# Altium PCB ESP8266 Xmas Lights.PcbDoc
Units mil, origin at the board's own origin, x right, y up, seen from the top; angles counter-clockwise.
Board outline 3661.42 x 2086.61 mil, 2 copper layers (Top Layer, Bottom Layer), stack 65.792 mil thick; 26 components, 26 nets, 99 pads, 18 vias.
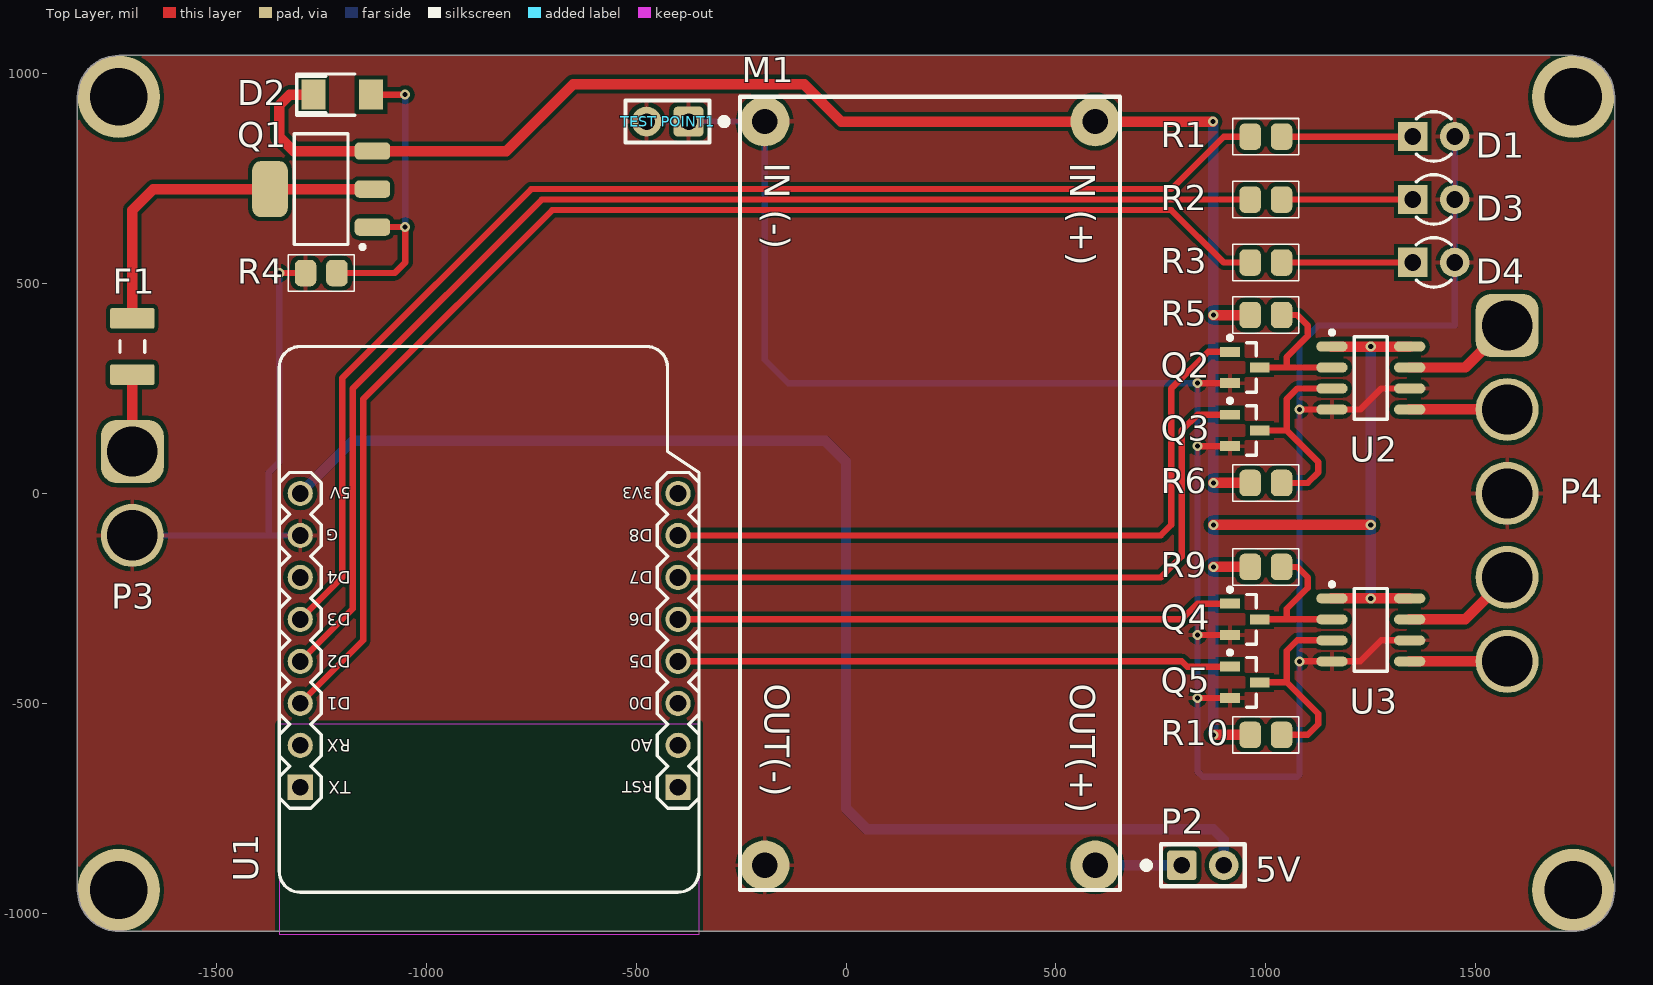
[diagram p0: Top Layer view]
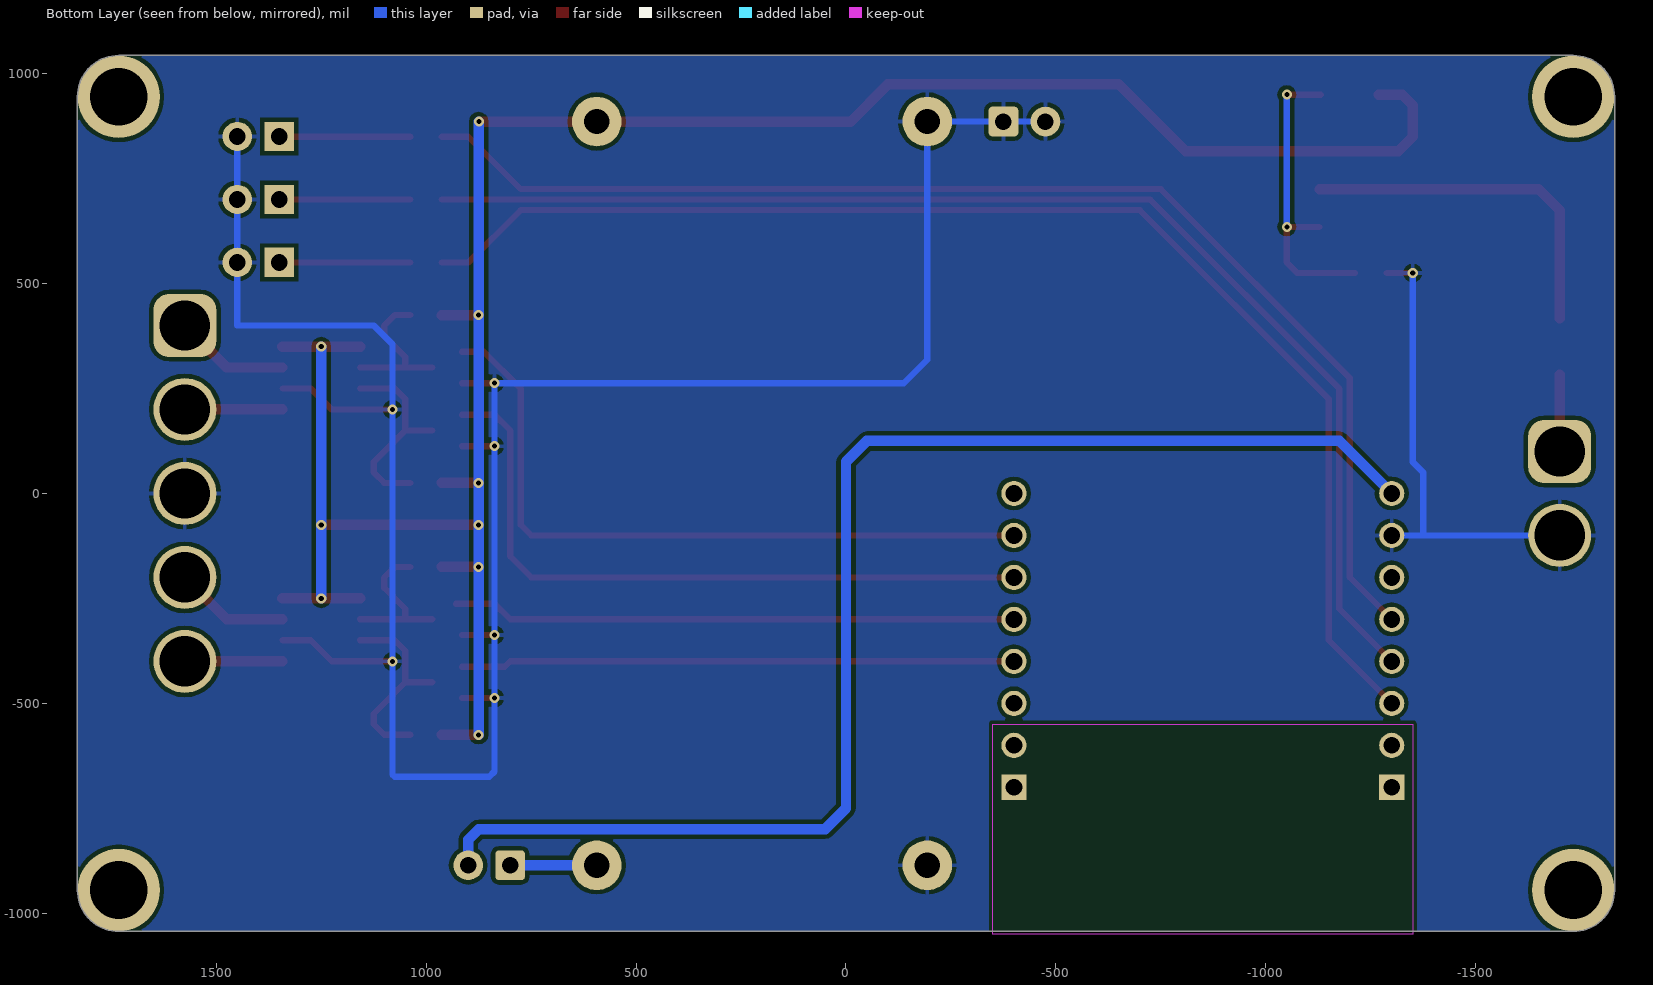
[diagram p1: Bottom Layer view, seen from below]
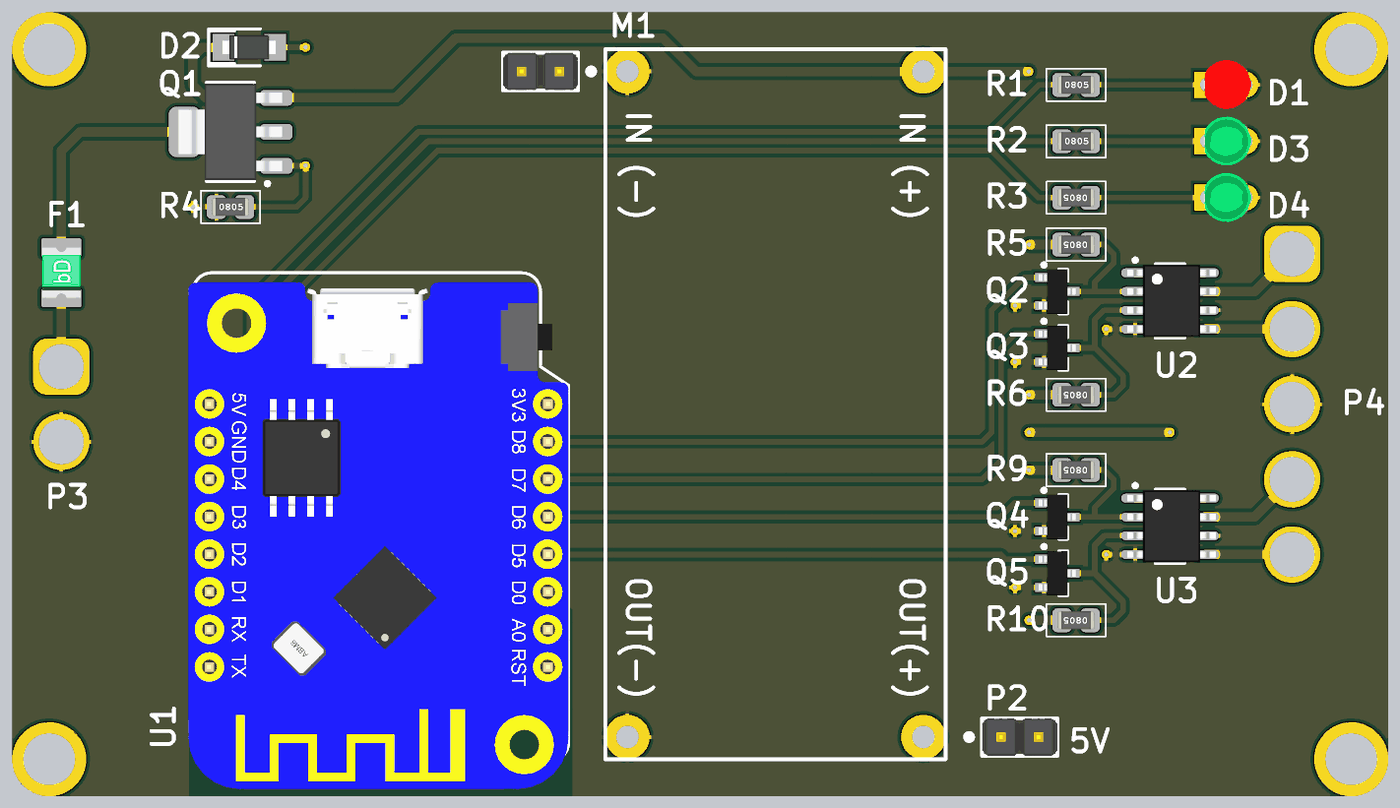
[diagram p2: 3D render of the assembled board from above, using the file's embedded part models]

## Layer stack, top to bottom
Top Solder: solder mask 0.4, Solder Resist, Dk 3.5
Top Layer: signal copper 1.4
Dielectric 1: dielectric 62.9921, FR-4, Dk 4.8
Bottom Layer: signal copper 1.4
Bottom Solder: solder mask 0.4, Solder Resist, Dk 3.5

## Board outline
-1830.71,-944.88 ccw(c-1732.28,-944.88) -1732.28,-1043.31 1732.28,-1043.31 ccw(c1732.28,-944.88) 1830.71,-944.88 1830.71,944.88 ccw(c1732.28,944.88) 1732.28,1043.31 -1732.28,1043.31 ccw(c-1732.28,944.88) -1830.71,944.88

## Design rules (kind name [scope] priority, off if disabled: settings)
Clearance [All] p1: gap=10
MinimumSolderMaskSliver [All] p1 off: minsoldermaskwidth=10
PolygonConnect [All] p1: connectstyle=Relief reliefconductorwidth=10 reliefentries=4 polygonreliefangle="90 Angle" airgapwidth=10
RoomDefinition "ESP8266 Xmas Lights" [InComponentClass('ESP8266 Xmas Lights')] p1: confinementstyle=ConfineIn formatcopy=TRUE lockcomponents=FALSE outline -1625,-1875 1625,-1875 1625,1875 -1625,1875
RoutingVias [All] p1: holewidth=12 width=24 viastyle="Through Hole" minholewidth=12 minwidth=24 maxholewidth=28 maxwidth=50
SilkToSilkClearance [All] p1 off: silktosilkclearance=10
SilkToSolderMaskClearance [IsPad] p1 off: minsilkscreentomaskgap=10 clearancetoexposedcopper=TRUE
SolderMaskExpansion [All] p1: expansion=4
Width [All] p1: maxlimit=250 minlimit=8 preferedwidth=10
27 further rules are at their usual default settings.

## Components (designator, comment, footprint, x,y, rotation, side; value= is the part's Value field where it differs from the comment)
D1 "LED (RED)" "LED(3D) 3MM VERTICAL (RED)" 1400,850 r180 top
D2 "LGE DZL4740" SOD-123FL -1200,950 r0 top
D3 "LED (GREEN)" "LED(3D) 3MM VERTICAL (GREEN)" 1400,700 r180 top
D4 "LED (BLUE)" "LED(3D) 3MM VERTICAL (GREEN)" 1400,550 r180 top
F1 "1000mA" "POLYSWITCH 1210" -1700,350 r90 top
M1 "LM2596 MODULE" "LM2596 Module" 200,0 r270 top
P2 "5V SET" "Pin Header 1x2 TH Pitch 2.54mm" 800,-885.83 r0 top
P3 "Header 2" "2 FLYING WIRES" -1700,0 r270 top
P4 "DEBUG" "5 FLYING WIRES" 1574.8,0 r270 top
Q1 "UT9435H" SOT223 -1250,725 r90 top
Q2 "MMUN2211LT1" SOT23-3L 950,300 r0 top
Q3 "MMUN2211LT1" SOT23-3L 950,150 r0 top
Q4 "MMUN2211LT1" SOT23-3L 950,-300 r0 top
Q5 "MMUN2211LT1" SOT23-3L 950,-450 r0 top
R1 "Value" "RESISTOR 0805" 1000,850 r0 top
R2 "Value" "RESISTOR 0805" 1000,700 r0 top
R3 "Value" "RESISTOR 0805" 1000,550 r180 top
R4 "10k" "RESISTOR 0805" -1250,525 r0 top
R5 "Value" "RESISTOR 0805" 1000,425 r180 top
R6 "Value" "RESISTOR 0805" 1000,25 r180 top
R9 "Value" "RESISTOR 0805" 1000,-175 r180 top
R10 "Value" "RESISTOR 0805" 1000,-575 r180 top
"TEST POINT1" "GND" "Pin Header 1x2 TH Pitch 2.54mm" -375,885.83 r180 top
U1 "WEMOS D1-MINI" "WEMOS PRO MINI" -850,-350 r180 top
U2 "U3116S" SO-8 1250,275 r0 top
U3 "U3116S" SO-8 1250,-325 r0 top

## Footprints (in the part's own frame and the unit in brackets; to place one, negate y for a bottom-side part, rotate by r counter-clockwise, add the part's x,y. Pads: shape width x height; smd on the part's side, far side on the other; paste and mask are expansions set on the pad)
"2 FLYING WIRES" [mil]
  rrect50% 150x150 hole 120: 1(-100,0)
  round 150 hole 120: 2(100,0)
"5 FLYING WIRES" [mil]
  rrect50% 150x150 hole 120: 1(-400,0)
  round 150 hole 120: 2(-200,0) 3(0,0) 4(200,0) 5(400,0)
"LED(3D) 3MM VERTICAL (GREEN)" [mil]
  rect 70x70 hole 40: 1(50.06,-0.28)
  round 70 hole 40: 2(-49.94,-0.28)
  silkscreen extent -42,-59 42,59, body extent -65,-65 61,64, height 196
"LED(3D) 3MM VERTICAL (RED)" [mil]
  rect 70x70 hole 40: 1(50.06,-0.28)
  round 70 hole 40: 2(-49.94,-0.28)
  silkscreen extent -42,-59 42,59, body extent -66,-66 61,64, height 207
"LM2596 Module" [mm]
  round 3 hole 1.524: 1(-22.5,10) 2(-22.5,-10) 3(22.5,-10) 4(22.5,10)
  silkscreen extent -24,-11.5 24,11.5
"Pin Header 1x2 TH Pitch 2.54mm" [mm] "PinHeader 1x2 TH Pitch 2.54mm"
  rrect25% 1.8x1.8 hole 1: 1(0,0)
  round 1.8 hole 1: 2(2.54,0)
  silkscreen extent -2.3,-1.27 3.81,1.27, body extent -1.27,-1.27 3.81,1.27, height 9.5
"POLYSWITCH 1210" [mm]
  rrect20% 1.25x2.7 smd: 1(-1.7,0) 2(1.7,0)
  silkscreen extent -0.35,-0.75 0.35,0.75, body extent -1.7,-1.3 1.7,1.3, height 0.71
"RESISTOR 0805" [mm]
  rrect50% 1.3x1.6 smd: 1(-0.95,0) 2(0.95,0)
  silkscreen extent -2,-1.1 2,1.1, body extent -1.25,-0.62 1.25,0.62, height 0.8
SO-8 [mm] "SOIC, 8-Leads, Body 4.9x3.9mm, Pitch 1.27mm, IPC High Density"
  oval 1.9x0.6 smd: 1(-2.35,1.905) 2(-2.35,0.635) 3(-2.35,-0.635) 4(-2.35,-1.905) 5(2.35,-1.905) 6(2.35,-0.635) 7(2.35,0.635) 8(2.35,1.905)
  silkscreen extent -2.47,-2.5 1,2.88, body extent -2.9,-2.45 3.1,2.45, height 1.75
SOD-123FL [mm] "SOD-123FL"
  rect 1.45x1.8 smd: 1(-1.75,0) 2(1.75,0)
  silkscreen extent -2.75,-1.25 0.75,1.25, body extent -1.8,-0.82 1.8,0.83, height 0.95
SOT23-3L [mm] "SOT23, 3-Leads, Body 2.9x1.3mm, Pitch 0.95mm, Lead Span 2.5mm, IPC High Density"
  rect 1.2x0.6 smd: 1(-0.9,0.95) 2(-0.9,-0.95) 3(0.9,0)
  silkscreen extent -1.02,-1.5 0.7,1.92, body extent -1.25,-1.5 1.25,1.5, height 1.12
SOT223 [mm] "SOT-223/SC-73; 4 Leads; Body 6.7 x 7.3 mm, inc. leads (LxW max)"
  rrect50% 1.05x2.15 smd: 1(-2.3,-3.1) 2(0,-3.1) 3(2.3,-3.1)
  rrect50% 3.4x2.15 smd: 4(0,3.1)
  silkscreen extent -3.62,-2.63 3.35,1.62, body extent -3.25,-3.5 3.25,3.5, height 1.67
"WEMOS PRO MINI" [mil]
  rect 60x60 hole 40: 1(-450,350) 16(450,350)
  round 60 hole 40: 2(-450,250) 3(-450,150) 4(-450,50) 5(-450,-50) 6(-450,-150) 7(-450,-250) 8(-450,-350) 9(450,-350) 10(450,-250) 11(450,-150) 12(450,-50) 13(450,50) 14(450,150) 15(450,250)
  silkscreen extent -500,-700 500,600, body extent -500,-674 512,674, height 391

## Part data
D1 D3 D4: library part "LED 3mm RED", "3mm RED LED"
D2: "10V 1W 10uA @ 7.6V SOD-123FL Zener Diode"
F1: library part "PTC 12V POLYFUSE SMT 1210 1.10A", "PTC 12V POLYFUSE SMT 1210 500mA (1210L110/12WR)"
P2 "TEST POINT1": library part "Header 2", "Header, 2-Pin"
P3: "Header, 2-Pin"
P4: library part "Header 5", "Header, 5 Pin"
Q1: "UT9435H P-CHANNEL ENHANCEMENT MODE"
Q2 Q3 Q4 Q5: library part "MMUN221LT1 NPN DIGITAL TRANSISTOR"
R1 R2 R3 R4 R5 R6 R9 R10: library part Res2, "Resistor"
U1: library part WEMOS
U2 U3: "U3116S High Current IO+/- 1.2/1.5A HALF-BRIDGE DRIVER"

## Free pads (board coordinates)
  round 10 on Mech4: 1(5082.1,-3582.94) 1(5082.1,-3582.94) 1(5082.62,-3660.05) 1(5082.62,-3660.05) 1(5269.4,-3515.17) 1(5269.4,-3515.17)
  round 196.85 hole 137.8: MOUNT(-1732.28,-944.88) MOUNT(-1732.28,944.88) MOUNT(1732.28,-944.88) MOUNT(1732.28,944.88)

## Via types
v1: diameter 24, hole 12, Top Layer to Bottom Layer, 18 vias

## Nets (pads, with @x,y where several pads share a name; then routed paths per layer and width w, separated by ;. In a path a pad name is that pad's centre, name@x,y a point inside that pad or via, vN(x,y) a via of type N, cw(c..) or ccw(c..) an arc to the next point about the centre after c; other vN are vias at no path point)
3V3: U1.8
24V: D2.1 M1.1 Q1.3 R5.2 R6.2 R9.2 R10.2 U2.1 U2.8 U3.1 U3.8 | length 5664.2
  Top Layer w25: D2.1 -1325,950 -1350,925 -1350,850 -1315.55,815.55 Q1.3 -809.45,815.55 -650,975 -100,975 -10.83,885.83 M1.1 v1(874.17,885.83) ; v1(875,-575) R10.2 ; v1(875,-175) R9.2 ; v1(875,-75) v1(1250,-75) ; v1(875,25) R6.2 ; v1(875,425) R5.2 ; U3.1 v1(1250,-250) U3.8 ; U2.1 v1(1250,350) U2.8
  Bottom Layer w25: v1(875,-575) v1(875,-175) v1(875,-75) v1(875,25) v1(875,425) v1@875,885.83 ; v1(1250,-250) v1(1250,-75) v1(1250,350)
A1: P4.1 U2.7 | length 273.7
  Top Layer w25: U2.7 1474.8,300 P4.1
A2: P4.2 U2.5 | length 232.3
  Top Layer w25: U2.5 P4.2
B1: P4.4 U3.7 | length 273.7
  Top Layer w25: U3.7 1474.8,-300 P4.4
B2: P4.5 U3.5 | length 232.3
  Top Layer w25: U3.5 P4.5
BLUE: R3.2 U1.14 | length 3137.9
  Top Layer w15: U1.14 -1150,-350 -1150,225 -700,675 775,675 900,550 R3.2
DRIVE_0: Q2.1 U1.7 | length 1686.1
  Top Layer w15: U1.7 750.1,-100 775.1,-75 775.1,249.9 862.6,337.4 Q2.1
DRIVE_1: Q3.1 U1.6 | length 1650.8
  Top Layer w15: U1.6 750.1,-200 800.1,-150 800.1,150.1 837.4,187.4 Q3.1
DRIVE_2: Q4.1 U1.5 | length 1344.6
  Top Layer w15: U1.5 800,-300 837.4,-262.6 Q4.1 Q4.1@929.13,-262.6
DRIVE_3: Q5.1 U1.4 | length 1319.8
  Top Layer w15: U1.4 800,-400 812.6,-412.6 Q5.1
GND: "TEST POINT1.1" "TEST POINT1.2" D1.2 D3.2 D4.2 M1.2 M1.3 P3.2 P4.3 Q2.2 Q3.2 Q4.2 Q5.2 R4.1 U1.10 U2.4 U2.6 U3.4 U3.6 | length 6914
  Top Layer w15: v1(-1350,525) R4.1 ; v1(837.4,-487.4) Q5.2 ; v1(837.4,-337.4) Q4.2 ; v1(837.4,112.6) Q3.2 ; v1(837.4,262.6) Q2.2 ; v1(1080.32,-400) U3.4 1225,-400 1275,-350 U3.6 ; v1(1080.32,200) U2.4 1225,200 1275,250 U2.6
  Bottom Layer w15: P3.2 -1375,-100 ; v1(-1350,525) -1350,75 -1375,50 -1375,-100 ; U1.10 -1375,-100 ; -475,885.83 -375,885.83 M1.2 -193.7,318.7 -137.6,262.6 v1(837.4,262.6) v1(837.4,112.6) v1(837.4,-337.4) v1(837.4,-487.4) 837.4,-662.4 850,-675 1075,-675 1080.32,-669.68 v1(1080.32,-400) v1(1080.32,200) 1080.32,355.32 1125,400 1450,400 1449.94,400.06 D4.2 D3.2 D1.2
GREEN: R2.1 U1.13 | length 3025.8
  Top Layer w15: U1.13 -1175,-275 -1175,250 -725,700 R2.1
NetD1_1: D1.1 R1.2 | length 312.3
  Top Layer w15: R1.2 D1.1@1349.66,850
NetD2_2: D2.2 Q1.1 R4.2 | length 722.6
  Top Layer w15: R4.2 -1075,525 -1050,550 v1(-1050,635) ; D2.2 v1(-1050,950) ; Q1.1 v1@-1059.45,634.45
  Bottom Layer w15: v1(-1050,635) v1(-1050,950)
NetD3_1: D3.1 R2.2 | length 312.3
  Top Layer w15: R2.2 D3.1@1349.66,700
NetD4_1: D4.1 R3.1 | length 312.3
  Top Layer w15: R3.1@1037.69,550.28 D4.1
NetF1_1: F1.1 P3.1 | length 183.1
  Top Layer w25: P3.1 F1.1
NetF1_2: F1.2 Q1.2 Q1.4 | length 850.8
  Top Layer w25: F1.2 -1700,675 -1650,725 Q1.4 Q1.2
NetM1_4: M1.4 P2.1 | length 206.3
  Bottom Layer w25: M1.4 P2.1
NetQ2_3: Q2.3 R5.1 U2.2 | length 365.7
  Top Layer w15: Q2.3 1050,300 ; R5.1 1075,425 1100,400 1100,375 1050,325 1050,300 ; U2.2 1050,300
NetQ3_3: Q3.3 R6.1 U2.3 | length 486.4
  Top Layer w15: Q3.3 1050,150 ; R6.1 1100,25 1125,50 1125,75 1050,150 ; U2.3 1075,250 1050,225 1050,150
NetQ4_3: Q4.3 R9.1 U3.2 | length 365.7
  Top Layer w15: Q4.3 1050,-300 ; R9.1 1075,-175 1100,-200 1100,-225 1050,-275 1050,-300 ; U3.2 1050,-300
NetQ5_3: Q5.3 R10.1 U3.3 | length 486.4
  Top Layer w15: Q5.3 1050,-450 ; R10.1 1100,-575 1125,-550 1125,-525 1050,-450 ; U3.3 1075,-350 1050,-375 1050,-450
RED: R1.1 U1.12 | length 3017.2
  Top Layer w15: U1.12 -1200,-200 -1200,275 -750,725 775,725 900,850 R1.1
VCC: P2.2 U1.9 | length 3189.4
  Bottom Layer w25: U1.9 -1175,125 -50,125 0,75 0,-750 50,-800 875,-800 900,-825 P2.2
pads on no net: U1.1 U1.2 U1.3 U1.11 U1.15 U1.16

## Polygon pours and split planes (outlines as drawn)
GND on Top Layer "Top Layer-No Net" (solid, remove dead copper, pour order 4): -1830.71,-944.88 ccw(c-1732.28,-944.88) -1732.28,-1043.31 1732.28,-1043.31 ccw(c1732.28,-944.88) 1830.71,-944.88 1830.71,944.88 ccw(c1732.28,944.88) 1732.28,1043.31 -1732.28,1043.31 ccw(c-1732.28,944.88) -1830.71,944.88
GND on Bottom Layer "Top Layer-No Net1" (solid, pour order 5): -1830.71,-944.88 ccw(c-1732.28,-944.88) -1732.28,-1043.31 1732.28,-1043.31 ccw(c1732.28,-944.88) 1830.71,-944.88 1830.71,944.88 ccw(c1732.28,944.88) 1732.28,1043.31 -1732.28,1043.31 ccw(c-1732.28,944.88) -1830.71,944.88

## Keep-outs
Keep-Out Layer:
  rectangle: -1350,-1050 -350,-550

## Silkscreen, mask and mechanical layers (free items; w line width, h text height)
Top Overlay:
  text "5V" at 975,-925 h60
Mechanical 1:
  circle w7.87: c1732.28,-944.88 r51.18
  circle w7.87: c-1732.28,944.88 r51.18
  circle w7.87: c-1732.28,-944.88 r51.18
  circle w7.87: c1732.28,944.88 r51.18
  lines w7.87: -1801.18,-944.88 -1732.28,-944.88 ; -1801.18,944.88 -1732.28,944.88 ; -1732.28,-1013.78 -1732.28,-944.88 ; -1732.28,-875.98 -1732.28,-944.88 ; -1732.28,875.98 -1732.28,944.88 ; -1732.28,1013.78 -1732.28,944.88 ; -1663.39,-944.88 -1732.28,-944.88 ; -1663.39,944.88 -1732.28,944.88 ; 1663.39,-944.88 1732.28,-944.88 ; 1663.39,944.88 1732.28,944.88 ; 1732.28,-1013.78 1732.28,-944.88 ; 1732.28,-875.98 1732.28,-944.88 ; 1732.28,875.98 1732.28,944.88 ; 1732.28,1013.78 1732.28,944.88 ; 1801.18,-944.88 1732.28,-944.88 ; 1801.18,944.88 1732.28,944.88 ; -1830.71,-944.88 ccw(c-1732.28,-944.88) -1732.28,-1043.31 1732.28,-1043.31 ccw(c1732.28,-944.88) 1830.71,-944.88 1830.71,944.88 ccw(c1732.28,944.88) 1732.28,1043.31 -1732.28,1043.31 ccw(c-1732.28,944.88) -1830.71,944.88 -1830.71,-944.88
Mechanical 4:
  drawing of 654 lines, arcs and shapes, not listed
  text "1" at -4645.67,3996.06 h60
  text "2" at -1377.95,3996.06 h60
  text "3" at 1574.8,3996.06 h60
  text "4" at 4389.76,3996.06 h60
  text "A" at -5767.72,3090.55 h60
  text "A" at 5728.35,3090.55 h60
  text "B" at -5787.4,1003.94 h60
  text "B" at 5708.66,1003.94 h60
  text "C" at -5767.72,-1122.05 h60
  text "C" at 5728.35,-1122.05 h60
  text "D" at -5767.72,-3248.03 h60
  text "D" at 5728.35,-3248.03 h60
  text "LOW COST LABS" at 2696.85,-3307.09 h177.17
  text "TITLE: TITLE NAME" at 1377.95,-3523.62 h177.17
  text "ludzinc.blogspot.com.au" at 3759.84,-3562.99 h98.43
  text "SIZE: A4" at 1377.95,-3700.79 h177.17
  text "Revison x.xx" at 2992.13,-3700.79 h78.74
  text "www.lowcostlabs.com.au" at 3740.16,-3700.79 h98.43
  text "DATE:" at 1377.95,-3818.9 h78.74
  text ".Print_Date" at 1614.17,-3818.9 h78.74
  text "SHEET 1 of 1" at 2992.13,-3818.9 h78.74
  text "FILE:" at 1377.95,-3917.32 h78.74
  text ".Pcb_File_Name" at 1614.17,-3917.32 h78.74
  text "S" at -5649.61,-3937.01 h590.55
  text "1" at -4645.67,-4055.12 h60
  text "2" at -1377.95,-4055.12 h60
  text "3" at 1574.8,-4055.12 h60
  text "4" at 4389.76,-4055.12 h60

## Text inside footprints (layer, text, board x,y; h text height)
M1: Top Overlay "OUT(-)" at -193.7,-452.76 h60 r270; Top Overlay "OUT(+)" at 534.65,-452.76 h60 r270; Top Overlay "IN (-)" at -193.7,787.4 h60 r270; Top Overlay "IN (+)" at 534.65,787.4 h60 r270
U1: Top Overlay "D0" at -460,-485 h29.75 r180; Top Overlay "D7" at -460,-185 h29.75 r180; Top Overlay "D8" at -460,-85 h29.75 r180; Top Overlay "3V3" at -460,15 h27.2 r180; Top Overlay "A0" at -460,-585 h29.75 r180; Top Overlay "D6" at -460,-285 h29.75 r180; Top Overlay "D5" at -460,-385 h29.75 r180; Top Overlay "5V" at -1180,15 h27.2 r180; Top Overlay "RST" at -460,-685 h27.2 r180; Top Overlay "G" at -1210,-85 h27.2 r180; Top Overlay "D3" at -1180,-285 h29.75 r180; Top Overlay "TX" at -1180,-685 h29.75 r180; Top Overlay "RX" at -1180,-585 h29.75 r180; Top Overlay "D1" at -1180,-485 h29.75 r180; Top Overlay "D2" at -1180,-385 h29.75 r180; Top Overlay "D4" at -1180,-185 h29.75 r180